# EAGLE board NrfPS2-2.0 (EAGLE 6.4)
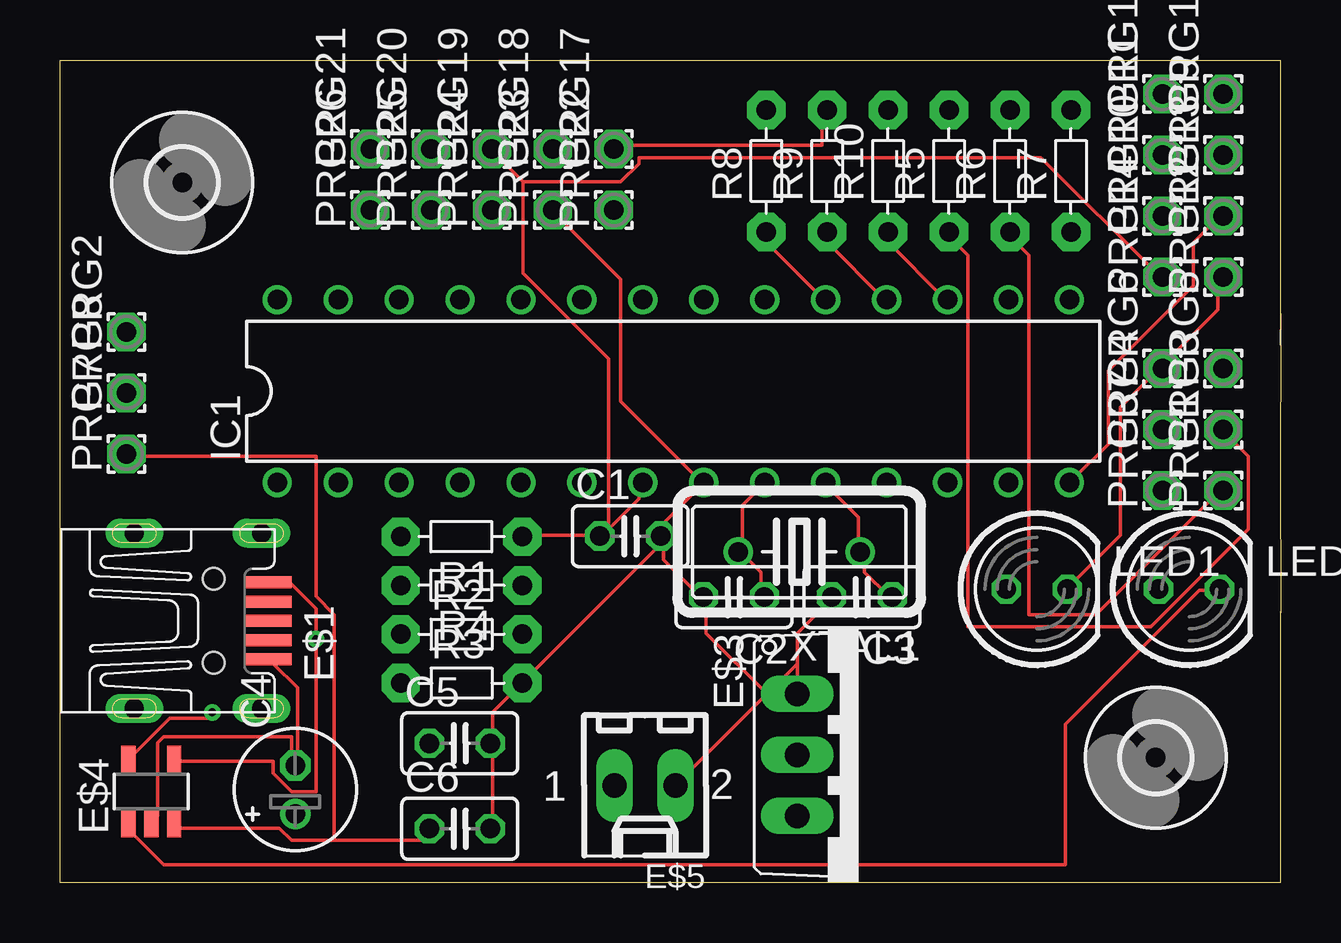
[diagram p0: board, top side]
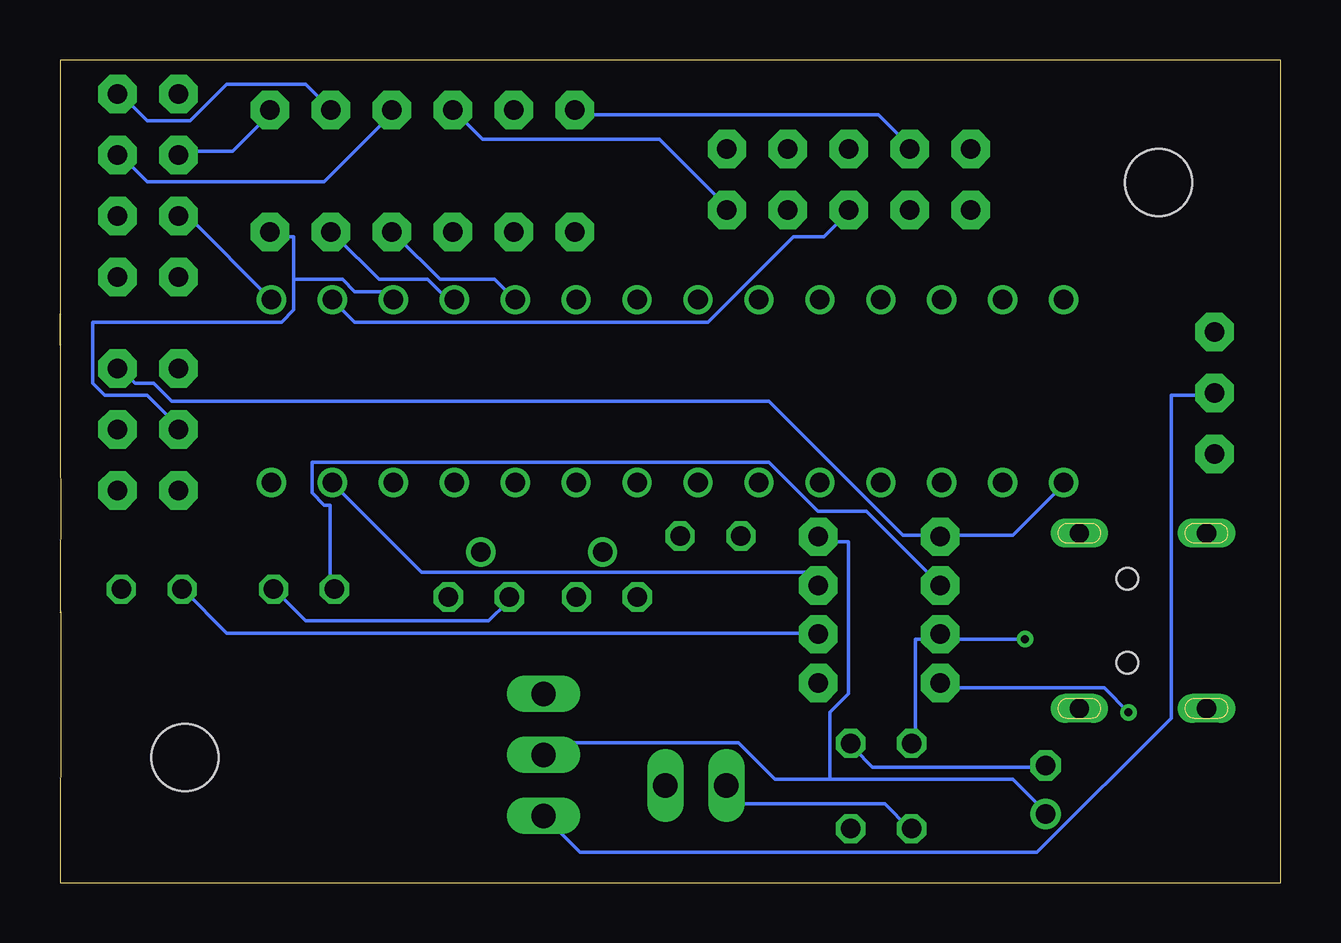
[diagram p1: board, bottom side, seen from below]

Size 50.89 x 34.29 mm. Coordinates in mm from the lower left corner, seen from the top.
Outline: 0,0 0,20.43 0.01,20.46 0.01,22.51 0,23.6 0,34.29 50.87,34.29 50.87,22.4 50.88,23.72 50.89,20.7 50.87,19.39 50.86,14.34 50.88,14.29 50.88,11.25 50.86,11.3 50.86,8.78 50.87,0 0,0
Copper layers (1*16): Top 0.0356mm / dielectric 1.5011mm / Bottom 0.0356mm
Design rules "LaenPCBOrder": minimum track width 6mil, minimum drill 13mil, track to track 6mil, track to pad 6mil, pad to pad 6mil, via to via 6mil, smd to smd 6mil, copper to edge 15mil, drill to drill 6mil, minimum pad ring 7mil, minimum via ring 7mil, stop-mask expansion 4mil, vias tented up to drill 0mil, thermal gap 10mil

## Footprints (pad centres in the part's own frame; a part is rotated, then mirrored left to right if it is on the bottom)
C025-025X050 = drill 0.813 octagon: 1 -1.27,0; 2 1.27,0
E2-5 = drill 0.813 pad 1.27: + -1.016,0 | drill 0.813 pad 1.27 octagon: - 1.016,0
UX60-MB-5S8 = smd 2 x 0.5: 1 8.65,1.6; 2 8.65,0.8; 3 8.65,0; 4 8.65,-0.8; 5 8.65,-1.6 | drill 0.8 long: M1 3.1,-3.65; M2 3.1,3.65; M3 8.4,3.65; M4 8.4,-3.65 | hole 0.9: 6.4,-1.75; 6.4,1.75
2,8 = hole 2.8: 0,0
TO220V = drill 1.016 long: 1 -2.54,-2.54; 2 0,-2.54; 3 2.54,-2.54
SOT23-5 = smd 0.6 x 1.2: 1 -0.95,-1.306; 2 0,-1.306; 3 0.95,-1.306; 4 0.95,1.306; 5 -0.95,1.306
6410-02 = drill 1.016 long: 1 1.27,0; 2 -1.27,0
PDIP-T28 = drill 0.813 pad 1.2: 1 -16.51,-3.81; 2 -13.97,-3.81; 3 -11.43,-3.81; 4 -8.89,-3.81; 5 -6.35,-3.81; 6 -3.81,-3.81; 7 -1.27,-3.81; 8 1.27,-3.81; 9 3.81,-3.81; 10 6.35,-3.81; 11 8.89,-3.81; 12 11.43,-3.81; 13 13.97,-3.81; 14 16.51,-3.81; 15 16.51,3.81; 16 13.97,3.81; 17 11.43,3.81; 18 8.89,3.81; 19 6.35,3.81; 20 3.81,3.81; 21 1.27,3.81; 22 -1.27,3.81; 23 -3.81,3.81; 24 -6.35,3.81; 25 -8.89,3.81; 26 -11.43,3.81; 27 -13.97,3.81; 28 -16.51,3.81
LED5MM = drill 0.813 octagon: A -1.27,0; K 1.27,0
1,6/0,8 = drill 0.813 pad 1.6 octagon: 1 0,0
R-5 = drill 0.813 pad 1.6 octagon: 1 -2.54,0; 2 2.54,0
HC18U-V = drill 0.813: 1 -2.54,0; 2 2.54,0

## Placement (x,y rotation side)
C1  [C025-025X050]  23.77,14.45 0 top
C2  [C025-025X050]  28.09,11.91 180 top
C3  [C025-025X050]  33.43,11.91 180 top
C4  [E2-5]  9.8,3.89 90 top
C5  [C025-025X050]  16.66,5.82 0 top
C6  [C025-025X050]  16.66,2.26 0 top
E$1  [UX60-MB-5S8]  0,10.92 0 top
E$2  [2,8]  5.1,29.18 0 top
E$3  [TO220V]  33.27,5.33 270 top
E$4  [SOT23-5]  3.81,3.81 0 top
E$5  [6410-02]  24.38,4.06 180 top
E$14  [2,8]  45.68,5.22 0 top
IC1  [PDIP-T28]  25.57,20.49 0 top
LED1  [LED5MM]  40.72,12.24 0 top
LED2  [LED5MM]  47.07,12.24 0 top
PRG1  [1,6/0,8]  48.49,16.36 90 top
PRG2  [1,6/0,8]  2.77,22.96 90 top
PRG3  [1,6/0,8]  48.49,18.9 90 top
PRG4  [1,6/0,8]  45.95,18.9 90 top
PRG5  [1,6/0,8]  48.49,21.44 90 top
PRG6  [1,6/0,8]  45.95,21.44 90 top
PRG7  [1,6/0,8]  2.77,17.88 90 top
PRG8  [1,6/0,8]  2.77,20.42 90 top
PRG9  [1,6/0,8]  48.49,30.33 90 top
PRG10  [1,6/0,8]  45.95,27.79 90 top
PRG11  [1,6/0,8]  45.95,30.33 90 top
PRG12  [1,6/0,8]  48.49,25.25 90 top
PRG13  [1,6/0,8]  48.49,27.79 90 top
PRG14  [1,6/0,8]  45.95,25.25 90 top
PRG15  [1,6/0,8]  48.49,32.87 90 top
PRG16  [1,6/0,8]  45.95,32.87 90 top
PRG17  [1,6/0,8]  23.09,30.58 90 top
PRG18  [1,6/0,8]  20.55,30.58 90 top
PRG19  [1,6/0,8]  18.01,30.58 90 top
PRG20  [1,6/0,8]  15.47,30.58 90 top
PRG21  [1,6/0,8]  12.93,30.58 90 top
PRG22  [1,6/0,8]  23.09,28.04 90 top
PRG23  [1,6/0,8]  20.55,28.04 90 top
PRG24  [1,6/0,8]  18.01,28.04 90 top
PRG25  [1,6/0,8]  15.47,28.04 90 top
PRG26  [1,6/0,8]  12.93,28.04 90 top
PRG37  [1,6/0,8]  45.95,16.36 90 top
R1  [R-5]  16.74,14.43 180 top
R2  [R-5]  16.74,10.36 0 top
R3  [R-5]  16.74,8.33 0 top
R4  [R-5]  16.74,12.4 180 top
R5  [R-5]  37.06,29.67 90 top
R6  [R-5]  39.6,29.67 90 top
R7  [R-5]  42.14,29.67 90 top
R8  [R-5]  29.44,29.67 90 top
R9  [R-5]  31.98,29.67 90 top
R10  [R-5]  34.52,29.67 90 top
XTAL1  [HC18U-V]  30.81,13.79 180 top

## Library data of the parts
C1-C3 C5 C6 = resistor
C4 = rcl
E$1 = con-hirose
E$2 E$14 = holes
E$3 E$4 = linear
E$5 = con-molex
IC1 = texas
LED1 LED2 = led
PRG1-PRG26 PRG37 = wirepad
R1-R10 = discrete
XTAL1 = crystal

## Nets
S$2: C1.2 C2.2 C3.2 C4.- C5.2 C6.2 E$1.5 E$3.1 E$4.2 E$5.2 IC1.8 LED1.K PRG6.1 PRG12.1 PRG23.1 R3.2
S$3: E$4.1 LED2.K
S$4: IC1.26
S$5: IC1.13 R4.1
S$6: C2.1 IC1.9 XTAL1.2
S$7: C3.1 IC1.10 XTAL1.1
S$8: IC1.1 PRG5.1 R1.2
S$9: IC1.18 PRG1.1 R6.1 R9.1
S$10: C1.1 C4.+ E$3.2 IC1.7 PRG14.1 PRG19.1 R1.1
S$11: IC1.15 PRG10.1
S$12: IC1.19 PRG3.1 R5.1 R8.1
S$13: IC1.17 PRG4.1 R7.1 R10.1
S$14: IC1.14 PRG13.1
S$15: IC1.16 PRG24.1
S$16: IC1.4
S$17: IC1.28
S$18: IC1.5
S$19: IC1.27
S$20: E$3.3 PRG8.1
S$21: IC1.2
S$22: LED1.A R4.2
S$23: IC1.3
S$24: IC1.6
S$25: IC1.11
S$26: IC1.12
S$27: IC1.25
S$28: IC1.24
S$29: IC1.23
S$30: IC1.22
S$31: IC1.21
S$32: IC1.20
S$33: LED2.A R2.2
S$35: C5.1 E$1.1 E$4.4 R2.1
S$36: E$4.5 R3.1
S$37: PRG9.1 R5.2
S$38: PRG11.1 R7.2
S$39: PRG15.1 R6.2
S$40: PRG17.1 R9.2
S$41: PRG22.1 R10.2
S$42: PRG20.1 R8.2
S$43: C6.1 E$4.3 E$5.1 PRG7.1

## Tracks (layer width: path | path; a pad name or v marks a point on that pad's centre or on a via)
S$2
  Top 0.152: PRG12.1 48.26,25.15 48.26,23.88 45.97,21.59 PRG6.1 45.72,21.34 44.2,19.81 44.2,14.48 42.16,12.45 LED1.K | 30.73,9.14 E$3.1 29.46,7.87 | 30.73,9.14 30.73,10.41 32,11.68 C3.2 | 30.73,9.14 29.46,7.87 | 29.46,7.87 E$5.2 | C6.2 18.03,2.29 18.03,5.59 C5.2 18.03,5.84 18.03,7.11 19.05,8.13 R3.2 19.3,8.38 24.89,13.97 24.89,14.22 C1.2 | E$4.2 3.81,2.54 4.06,2.79 4.06,5.84 4.32,6.1 9.65,6.1 9.65,5.08 C4.- 9.91,5.08 9.91,8.13 8.89,9.14 E$1.5 | C1.2 25.15,14.22 25.15,13.46 26.67,11.94 C2.2 26.92,11.68 26.92,10.41 29.46,7.87 | C1.2 25.15,14.48 25.15,14.99 26.67,16.51 IC1.8 26.67,16.76 23.37,20.07 23.37,25.15 20.57,27.94 PRG23.1
  Bottom 0.152: LED1.K 41.91,12.19 40.64,10.92 33.02,10.92 32.26,11.68 C3.2 | C5.2 17.78,5.59 17.02,4.83 9.91,4.83 C4.-
S$3
  Top 0.152: E$4.1 3.05,2.29 3.05,2.03 4.32,0.76 41.91,0.76 41.91,6.6 47.5,12.19 48.26,12.19 LED2.K
S$5
  Bottom 0.152: IC1.13 39.37,16.51 35.81,12.95 19.81,12.95 19.3,12.45 R4.1
S$6
  Top 0.152: C2.1 29.21,11.94 29.21,12.95 28.45,13.72 XTAL1.2 28.45,13.97 28.45,15.75 29.21,16.51 IC1.9
S$7
  Top 0.152: C3.1 34.54,11.94 33.53,12.95 33.53,13.72 XTAL1.1 33.27,13.97 33.27,15.24 32,16.51 IC1.10
S$8
  Bottom 0.152: IC1.1 9.14,16.51 11.18,14.48 13.97,14.48 R1.2 14.22,14.48 15.75,14.48 21.34,20.07 46.23,20.07 46.99,20.83 47.75,20.83 48.26,21.34 PRG5.1
S$9
  Top 0.152: IC1.18 34.29,24.38 32,26.67 32,26.92 R9.1 | PRG1.1 48.26,16.26 43.18,11.18 40.39,11.18 40.39,26.16 39.62,26.92 R6.1
  Bottom 0.152: R6.1 39.37,26.92 37.59,25.15 35.56,25.15 34.8,24.38 34.54,24.38 IC1.18
S$10
  Top 0.152: 22.86,14.73 24.13,16 24.13,16.51 IC1.7 | 22.86,14.73 22.61,14.48 C1.1 | 19.3,29.21 18.03,30.48 PRG19.1 | 19.3,29.21 19.3,25.4 22.86,21.84 22.86,14.73 | 22.86,14.73 C1.1 | R1.1 19.3,14.48 22.35,14.48 C1.1 | 19.3,29.21 23.37,29.21 24.13,29.97 24.13,30.23 40.89,30.23 45.72,25.4 PRG14.1
  Bottom 0.152: 18.8,4.32 21.08,4.32 22.61,5.84 30.23,5.84 E$3.2 | 18.8,4.32 11.18,4.32 9.91,3.05 C4.+ | 18.8,4.32 18.8,7.11 18.03,7.87 18.03,14.22 19.05,14.22 R1.1
S$11
  Bottom 0.152: IC1.15 42.16,24.38 45.47,27.69 45.72,27.69 PRG10.1
S$12
  Top 0.152: IC1.19 31.75,24.38 29.46,26.67 29.46,26.92 R8.1 | PRG3.1 48.51,18.8 49.53,17.78 49.53,14.73 45.47,10.67 37.85,10.67 37.85,26.16 37.08,26.92 R5.1
  Bottom 0.152: R5.1 36.83,26.92 35.05,25.15 32.77,25.15 32,24.38 IC1.19
S$13
  Top 0.152: IC1.17 36.83,24.38 34.54,26.67 34.54,26.92 R10.1
  Bottom 0.152: 41.15,25.15 41.15,26.92 41.91,26.92 R7.1 | 41.15,25.15 41.15,23.88 41.66,23.37 49.53,23.37 49.53,20.83 49.02,20.32 47.24,20.32 45.97,19.05 PRG4.1 | 41.15,25.15 39.12,25.15 38.61,24.64 37.34,24.64 37.08,24.38 IC1.17
S$14
  Top 0.152: IC1.14 42.16,16.76 43.69,18.29 43.69,21.34 47.24,24.89 47.24,26.67 48.26,27.69 PRG13.1
S$15
  Bottom 0.152: IC1.16 39.37,24.13 38.61,23.37 23.88,23.37 20.32,26.92 19.05,26.92 18.03,27.94 PRG24.1
S$20
  Bottom 0.152: E$3.3 29.21,1.27 10.16,1.27 4.57,6.86 4.57,20.32 2.79,20.32 PRG8.1
S$22
  Bottom 0.152: LED1.A 39.62,12.45 39.62,15.75 39.88,15.75 40.39,16.26 40.39,17.53 21.34,17.53 19.3,15.49 17.27,15.49 14.22,12.45 R4.2
S$33
  Bottom 0.152: LED2.A 45.72,12.19 43.94,10.41 19.3,10.41 R2.2
S$35  (via drill 0.33)
  Top 0.152: E$4.4 4.83,5.08 8.89,5.08 8.89,4.57 9.65,3.81 10.67,3.81 v10.67,10.16 10.67,11.43 9.65,12.45 8.89,12.45 E$1.1
  Bottom 0.152: C5.1 15.24,5.84 15.24,10.16 14.22,10.16 R2.1 13.97,10.16 v10.67,10.16
S$36  (via drill 0.33)
  Top 0.152: v6.35,7.11 6.35,6.86 4.57,6.86 3.05,5.33 E$4.5
  Bottom 0.152: v6.35,7.11 7.37,8.13 13.97,8.13 R3.1
S$37
  Bottom 0.152: R5.2 37.08,32 39.88,29.21 47.24,29.21 48.26,30.23 PRG9.1
S$38
  Bottom 0.152: R7.2 42.16,32 43.69,30.48 45.72,30.48 PRG11.1
S$39
  Bottom 0.152: R6.2 39.62,32.26 40.64,33.27 43.94,33.27 45.47,31.75 47.24,31.75 48.26,32.77 PRG15.1
S$40
  Top 0.152: PRG17.1 23.11,30.73 31.75,30.73 31.75,32 R9.2
S$41
  Bottom 0.152: PRG22.1 23.11,28.19 25.91,30.99 33.27,30.99 34.29,32 R10.2
S$42
  Bottom 0.152: PRG20.1 15.49,30.73 16.76,32 29.21,32 R8.2
S$43
  Top 0.152: 11.43,1.78 15.24,1.78 15.24,2.03 C6.1 | 11.43,1.78 9.65,1.78 9.14,2.29 4.83,2.29 E$4.3 | 11.43,1.78 11.43,11.18 10.67,11.94 10.67,17.78 2.79,17.78 PRG7.1
  Bottom 0.152: E$5.1 22.35,3.3 16.51,3.3 15.49,2.29 C6.1

## Text on the board
tNames: PSX | 1 | 1K | 1K | 1K | 1K | 1K | 1K | NRF24 | ATmega328 | PWRSW | ICSP | 16MHz | 1 | 4.7K | 0.1uF | 330 | + | + | 330 | 22pF | 22pF | PD7 | CHG | 2K | + | 4.7uF | MCP73831 | 100uF | 4.7uF | VREG